# EAGLE board Lab4 (EAGLE 7.1.0)

Size 100 x 75 mm. Coordinates in mm from the lower left corner, seen from the top.
Outline: 0,0 100,0 100,75 0,75 0,0
Copper layers (1*16): Top 0.035mm / dielectric 1.5mm / Bottom 0.035mm
Design rules "default": minimum track width 10mil, minimum drill 24mil, track to track 8mil, track to pad 8mil, pad to pad 8mil, via to via 8mil, smd to smd 8mil, copper to edge 40mil, drill to drill 8mil, minimum pad ring 10mil, minimum via ring 8mil, stop-mask expansion 4mil, vias tented up to drill 0mil, thermal gap 10mil
Net classes: 0 default: clearance 0.205 mm

## Footprints (pad centres in the part's own frame; a part is rotated, then mirrored left to right if it is on the bottom)
TP2 = drill 0.8: MP 0,0; MP1 2.54,0
CAP100MIL = drill 0.8: 1 -1.27,0; 2 1.27,0
DO35-7 = drill 0.813 long: A 3.81,0; C -3.81,0
ST7735 = drill 1 square: 1 -10.16,-30.48 | drill 1 long: 2 -7.62,-30.48; 3 -5.08,-30.48; 4 -2.54,-30.48; 5 0,-30.48; 6 2.54,-30.48; 7 5.08,-30.48; 8 7.62,-30.48; 9 10.16,-30.48; 10 12.7,-30.48 | hole 3: -13.335,20.32; 15.875,20.32
TO220 = drill 1.1 long: 1 -2.54,-6.35; 2 0,-6.35; 3 2.54,-6.35 | hole 3.302: 0,11.176
DIL08 = drill 0.8 pad 1.6 square: 1 -3.81,-3.81 | drill 0.8 pad 1.6: 2 -1.27,-3.81; 3 1.27,-3.81; 4 3.81,-3.81; 5 3.81,3.81; 6 1.27,3.81; 7 -1.27,3.81; 8 -3.81,3.81
TM4C123LAUNCHPAD = drill 0.8 square: 1 -22.86,12.7 | drill 0.8: 2 -22.86,10.16; 3 -22.86,7.62; 4 -22.86,5.08; 5 -22.86,2.54; 6 -22.86,0; 7 -22.86,-2.54; 8 -22.86,-5.08; 9 -22.86,-7.62; 10 -22.86,-10.16; 11 22.86,-10.16; 12 22.86,-7.62; 13 22.86,-5.08; 14 22.86,-2.54; 15 22.86,0; 16 22.86,2.54; 17 22.86,5.08; 18 22.86,7.62; 19 22.86,10.16; 20 22.86,12.7; 21 -20.32,12.7; 22 -20.32,10.16; 23 -20.32,7.62; 24 -20.32,5.08; 25 -20.32,2.54; 26 -20.32,0; 27 -20.32,-2.54; 28 -20.32,-5.08; 29 -20.32,-7.62; 30 -20.32,-10.16; 31 20.32,-10.16; 32 20.32,-7.62; 33 20.32,-5.08; 34 20.32,-2.54; 35 20.32,0; 36 20.32,2.54; 37 20.32,5.08; 38 20.32,7.62; 39 20.32,10.16; 40 20.32,12.7
DCMOTOR = drill 1 square: 1 -3.81,0 | drill 1: 2 -1.27,0; 3 1.27,0; 4 3.81,0

## Placement (x,y rotation side)
+3.3V  TP2  [TP2]  82.55,72.39 0 top
+5V  TP2  [TP2]  68.58,72.39 0 top
C3  0.1uF  [CAP100MIL]  59.69,38.1 270 top
D1  1N914B  [DO35-7]  8.89,52.07 0 top
DIS1  ST7735  [ST7735]  74.93,36.83 90 bottom
GND  TP2  [TP2]  45.72,72.39 0 top
Q1  TIP120  [TO220]  24.13,35.56 0 top
U1  OPA2350N  [DIL08]  66.04,38.1 0 top
U$1  EK-TM4C1294XL_BOOST2  [TM4C123LAUNCHPAD]  17.78,38.1 270 top
U$2  EK-TM4C1294XL_BOOST1  [TM4C123LAUNCHPAD]  81.28,38.1 270 top
V1  DCMOTORDCM-408  [DCMOTOR]  11.43,38.1 90 top

## Library data of the parts
+3.3V +5V C3 D1 GND Q1 U$1 U$2 = EE445L
DIS1 U1 V1 = EE445L; OC_FARNELL: unknown; OC_NEWARK: unknown

## Nets
+3.3V: +3.3V.MP +3.3V.MP1 DIS1.2 DIS1.10 U$1.1 U$2.1
+5V: +5V.MP +5V.MP1 U$1.21 U$2.21
ANY_PIN: DIS1.6
GND: C3.2 DIS1.1 GND.MP GND.MP1 U$1.22 U$2.22
GND2: U$1.20 U$2.20
PA2: DIS1.8 U$1.14
PA3: DIS1.5 U$1.15
PA4: DIS1.9 U$1.29
PA5: DIS1.7 U$1.30
PA6: DIS1.4 U$2.28
PA7: DIS1.3 U$1.17
V+: U1.8
V-: U1.4

## Tracks (layer width: path | path; a pad name or v marks a point on that pad's centre or on a via)
+3.3V  (5 unrouted)
+5V  (3 unrouted)
GND  (5 unrouted)
GND2  (1 unrouted)
PA2  (1 unrouted)
PA3  (1 unrouted)
PA4  (1 unrouted)
PA5  (1 unrouted)
PA6  (1 unrouted)
PA7  (1 unrouted)

## Text on the board
Document: 2.5in from pin1 to pin1